# Altium PCB Connect.PCBDOC
Units mm, origin at the board's own origin, x right, y up, seen from the top; angles counter-clockwise.
Board outline 152.4 x 101.6 mm, 2 copper layers (Top Layer, Bottom Layer); 24 components, 27 nets, 102 pads, 2 vias.
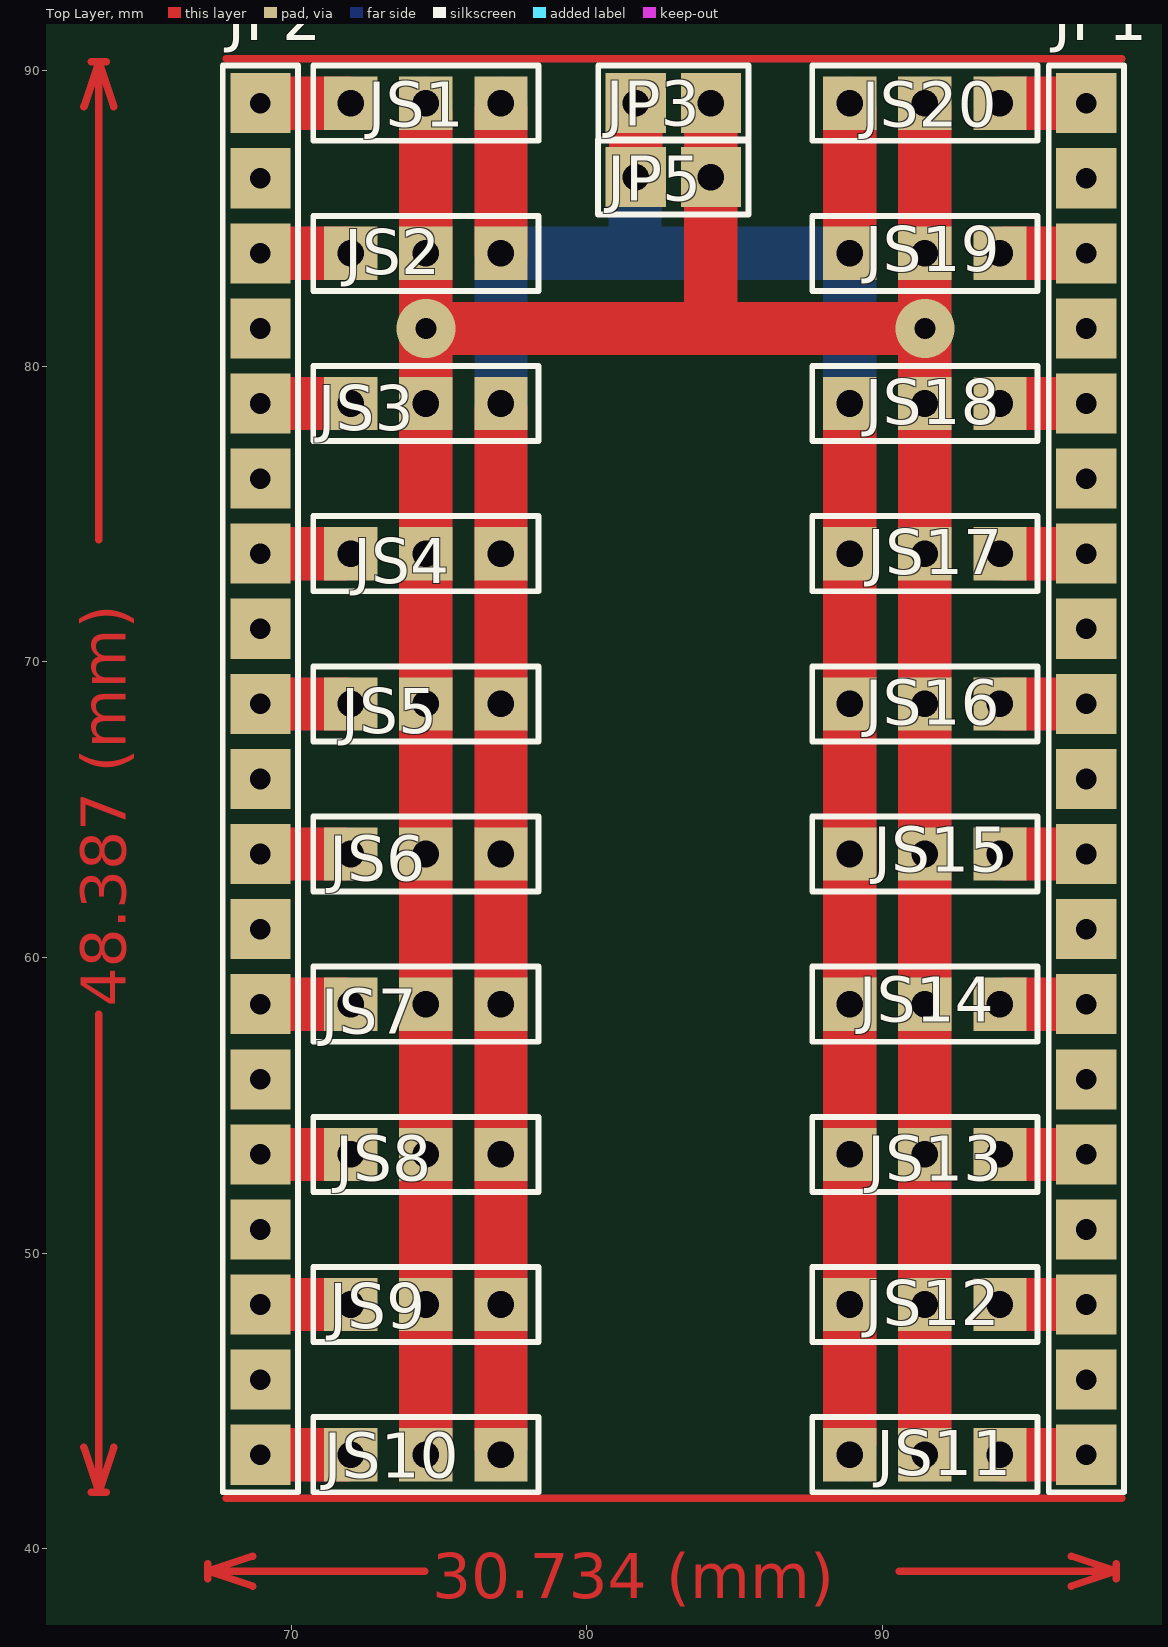
[diagram p0: Top Layer view]
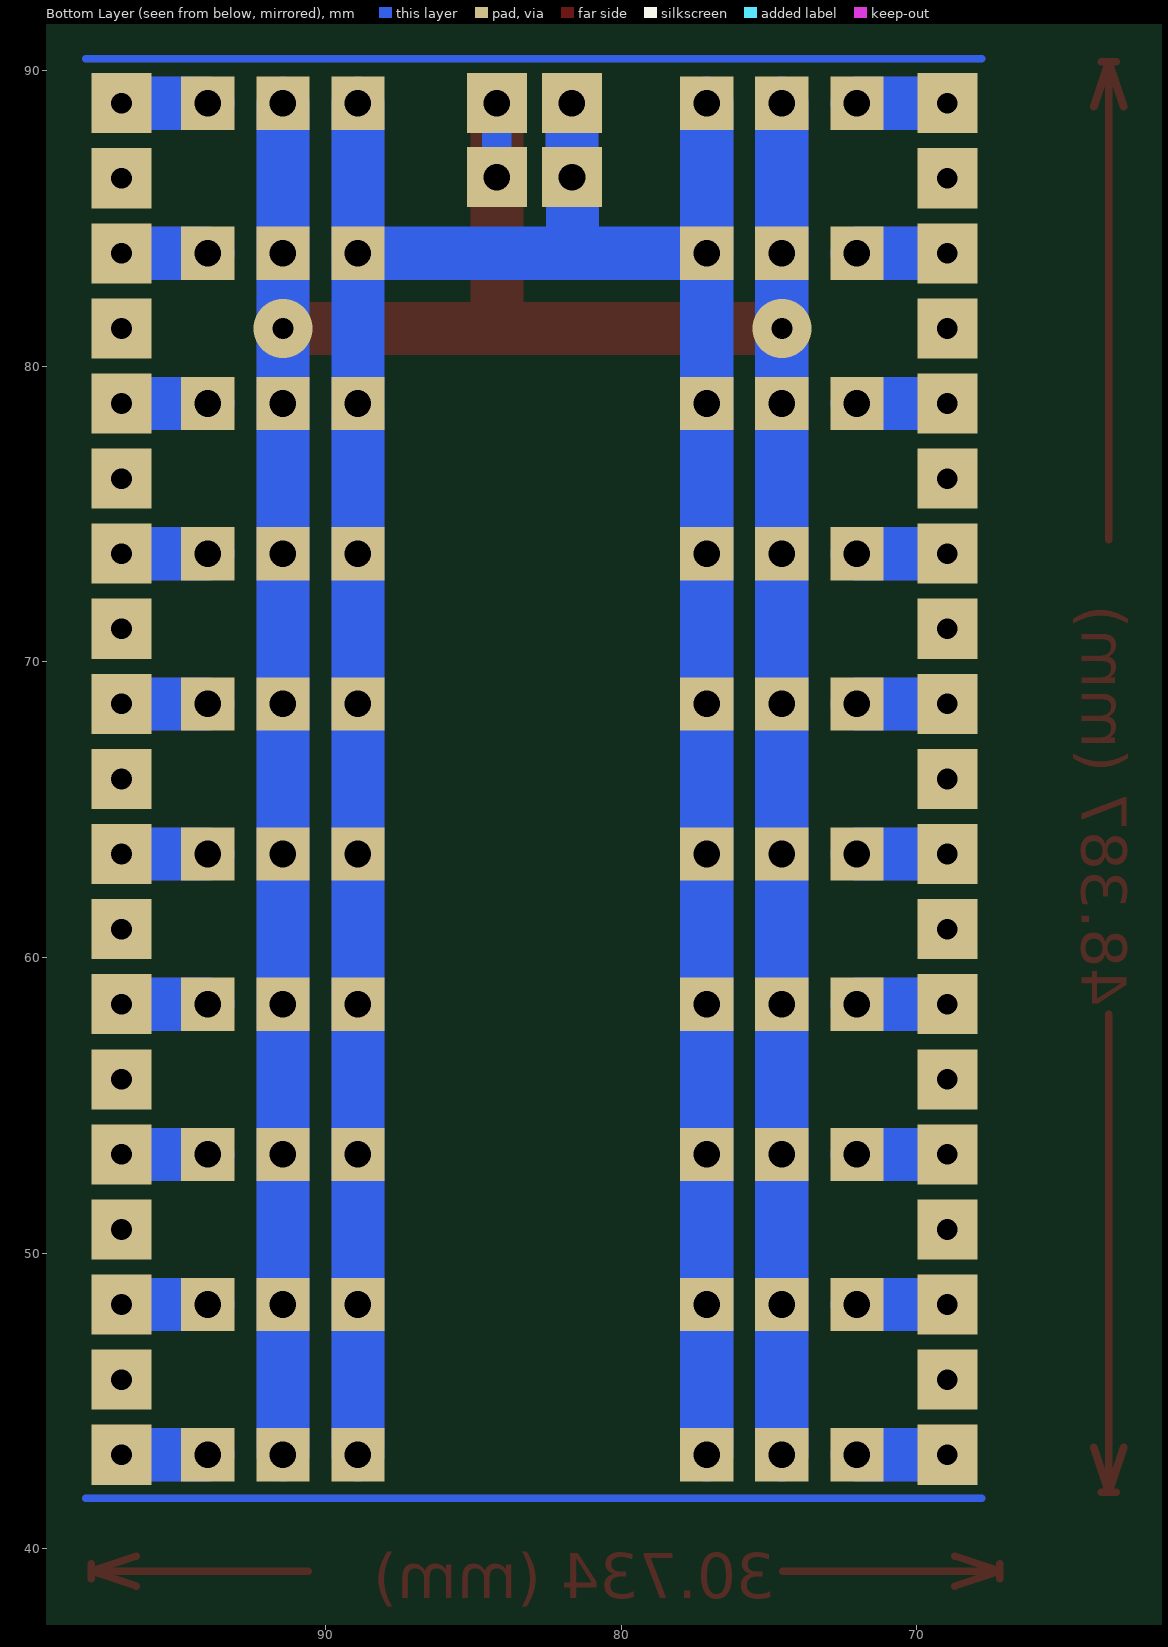
[diagram p1: Bottom Layer view, seen from below]

## Layer stack, top to bottom
Top Layer: signal copper 0.0356
Dielectric: dielectric 0.32, FR-4, Dk 4.8
Bottom Layer: signal copper 0.0356

## Board outline
25.4,25.4 177.8,25.4 177.8,127 25.4,127

## Design rules (kind name [scope] priority, off if disabled: settings)
Clearance [All] p1: gap=0.3
ComponentClearance [All] p1 off: gap=0.254 collisioncheckmode=0
PolygonConnect [All] p1: connectstyle=Relief reliefconductorwidth=0.254 reliefentries=4 polygonreliefangle="90 Angle"
RoutingLayers [All] p1: top layer=Horizontal bottom layer=Vertical
RoutingVias [All] p1: holewidth=0.711 width=1.27 viastyle="Through Hole" minholewidth=0.711 minwidth=1.27 maxholewidth=0.711 maxwidth=1.27
SolderMaskExpansion [All] p1: expansion=0.102
TestPointUsage [All] p1: valid=0 allowmultiple=FALSE
Testpoint [All] p1: side=15 testpointundercomponent=TRUE minsize=1.016 maxsize=2.54 preferedsize=1.524 minholesize=0 maxholesize=1.016 preferedholesize=0.813 testpointgrid=0.025 style=1023 order=-539222988
Width [All] p1: maxlimit=2 minlimit=0.3 preferedwidth=0.3 toplayer_minwidth=0.5 toplayer_prefwidth=1 bottomlayer_minwidth=0.5 bottomlayer_prefwidth=1 minimp=50.000000 maximp=50.000000 favimp=50.000000
16 further rules are at their usual default settings.

## Components (designator, comment, footprint, x,y, rotation, side; value= is the part's Value field where it differs from the comment)
JP1 "Header 19" HDR1X19 96.901,43.18 r90 top
JP2 "Header 19" HDR1X19 68.961,43.18 r90 top
JP3 "Header 2" HDR1X2 84.201,88.9 r180 top
JP5 "Header 2" HDR1X2 84.2,86.4 r180 top
JS1 "Header 3" HDR1X3 77.1,88.9 r180 top
JS2 "Header 3" HDR1X3 77.1,83.82 r180 top
JS3 "Header 3" HDR1X3 77.1,78.74 r180 top
JS4 "Header 3" HDR1X3 77.1,73.66 r180 top
JS5 "Header 3" HDR1X3 77.1,68.58 r180 top
JS6 "Header 3" HDR1X3 77.1,63.5 r180 top
JS7 "Header 3" HDR1X3 77.1,58.42 r180 top
JS8 "Header 3" HDR1X3 77.1,53.34 r180 top
JS9 "Header 3" HDR1X3 77.1,48.26 r180 top
JS10 "Header 3" HDR1X3 77.1,43.18 r180 top
JS11 "Header 3" HDR1X3 88.9,43.18 r0 top
JS12 "Header 3" HDR1X3 88.9,48.26 r0 top
JS13 "Header 3" HDR1X3 88.9,53.34 r0 top
JS14 "Header 3" HDR1X3 88.9,58.42 r0 top
JS15 "Header 3" HDR1X3 88.9,63.5 r0 top
JS16 "Header 3" HDR1X3 88.9,68.58 r0 top
JS17 "Header 3" HDR1X3 88.9,73.66 r0 top
JS18 "Header 3" HDR1X3 88.9,78.74 r0 top
JS19 "Header 3" HDR1X3 88.9,83.82 r0 top
JS20 "Header 3" HDR1X3 88.9,88.9 r0 top

## Footprints (in the part's own frame and the unit in brackets; to place one, negate y for a bottom-side part, rotate by r counter-clockwise, add the part's x,y. Pads: shape width x height; smd on the part's side, far side on the other; paste and mask are expansions set on the pad)
HDR1X2 [mil] "Connector; Header; 2 Position"
  rect 80x80 hole 35.43: 1(0,0) 2(100,0)
  silkscreen extent -50,-50 150,50
HDR1X3 [mm] "Connector; Header; 3 Position"
  rect 1.8x1.8 hole 0.9: 1(0,0) 2(2.54,0) 3(5.08,0)
  silkscreen extent -1.27,-1.27 6.35,1.27
HDR1X19 [mil] "Connector; Header; 19 Position"
  rect 80x80 hole 27.56: 1(0,0) 2(100,0) 3(200,0) 4(300,0) 5(400,0) 6(500,0) 7(600,0) 8(700,0) 9(800,0) 10(900,0) 11(1000,0) 12(1100,0) 13(1200,0) 14(1300,0) 15(1400,0) 16(1500,0) 17(1600,0) 18(1700,0) 19(1800,0)
  silkscreen extent -50,-50 1850,50

## Part data
JP1 JP2: "Header, 19-Pin"
JP3 JP5: "Header, 2-Pin"
JS1 JS2 JS3 JS4 JS5 JS6 JS7 JS8 JS9 JS10 JS11 JS12 JS13 JS14 JS15 JS16 JS17 JS18 JS19 JS20: "Header, 3-Pin"

## Via types
v1: diameter 2, hole 0.711, Top Layer to Bottom Layer, 2 vias

## Nets (pads, with @x,y where several pads share a name; then routed paths per layer and width w, separated by ;. In a path a pad name is that pad's centre, name@x,y a point inside that pad or via, vN(x,y) a via of type N, cw(c..) or ccw(c..) an arc to the next point about the centre after c; other vN are vias at no path point)
5V: JP3.1 JP5.1 JS1.2 JS2.2 JS3.2 JS4.2 JS5.2 JS6.2 JS7.2 JS8.2 JS9.2 JS10.2 JS11.2 JS12.2 JS13.2 JS14.2 JS15.2 JS16.2 JS17.2 JS18.2 JS19.2 JS20.2 | length 208.6
  Top Layer w1.8: JS10.2@74.56,43.33 JS1.2@74.56,88.53 ; v1(74.56,81.28) v1(91.44,81.28) ; 84.2,81.28 JP3.1@84.2,88.71 ; JS11.2@91.44,43.54 JS20.2@91.44,88.68
  Bottom Layer w1: JP5.1 JP3.1
  Bottom Layer w1.8: JS10.2 JS1.2 ; JS11.2 JS20.2
GND: JP3.2 JP5.2 JS1.1 JS2.1 JS3.1 JS4.1 JS5.1 JS6.1 JS7.1 JS8.1 JS9.1 JS10.1 JS11.1 JS12.1 JS13.1 JS14.1 JS15.1 JS16.1 JS17.1 JS18.1 JS19.1 JS20.1 | length 189.9
  Top Layer w1.8: JS10.1@77.1,43.44 JS3.1@77.1,78.51 ; JS2.1 JS1.1@77.1,88.7 ; JP5.2@81.66,86.69 JP3.2@81.66,88.7 ; JS11.1@88.9,43.59 JS18.1@88.9,78.39 ; JS19.1 JS20.1@88.9,88.65
  Bottom Layer w1.8: JS10.1 JS1.1 ; JS2.1 JS19.1 ; 81.64,83.82 JP3.2 ; JS11.1 JS20.1
NetC1_2: 
NetC3_1: 
NetC3_2: 
NetD4_1: 
NetD4_2: 
SERVO1: JP2.19 JS1.3 | length 5.9
  Top Layer w1.8: JP2.19@69.1,88.9 JS1.3@71.9,88.9
  Bottom Layer w1.8: JP2.19 JS1.3
SERVO2: JP2.17 JS2.3 | length 5.5
  Top Layer w1.8: JP2.17@69.5,83.82 JS2.3@71.91,83.82
  Bottom Layer w1.8: JP2.17 JS2.3
SERVO3: JP2.15 JS3.3 | length 5.6
  Top Layer w1.8: JP2.15@69.27,78.74 JS3.3@71.81,78.74
  Bottom Layer w1.8: JP2.15 JS3.3
SERVO4: JP2.13 JS4.3 | length 5.4
  Top Layer w1.8: JP2.13@69.45,73.66 JS4.3@71.78,73.66
  Bottom Layer w1.8: JP2.13 JS4.3
SERVO5: JP2.11 JS5.3 | length 5.5
  Top Layer w1.8: JP2.11@69.37,68.58 JS5.3@71.86,68.58
  Bottom Layer w1.8: JP2.11 JS5.3
SERVO6: JP2.9 JS6.3 | length 5.5
  Top Layer w1.8: JP2.9@69.3,63.5 JS6.3@71.78,63.5
  Bottom Layer w1.8: JP2.9 JS6.3
SERVO7: JP2.7 JS7.3 | length 5.4
  Top Layer w1.8: JP2.7@69.41,58.42 JS7.3@71.78,58.42
  Bottom Layer w1.8: JP2.7 JS7.3
SERVO8: JP2.5 JS8.3 | length 5.5
  Top Layer w1.8: JP2.5@69.43,53.34 JS8.3@71.89,53.34
  Bottom Layer w1.8: JP2.5 JS8.3
SERVO9: JP2.3 JS9.3 | length 5.5
  Top Layer w1.8: JP2.3@69.44,48.26 JS9.3@71.87,48.26
  Bottom Layer w1.8: JP2.3 JS9.3
SERVO10: JP2.1 JS10.3 | length 5.5
  Top Layer w1.8: JP2.1@69.43,43.18 JS10.3@71.87,43.18
  Bottom Layer w1.8: JP2.1 JS10.3
SERVO11: JP1.1 JS11.3 | length 5.5
  Top Layer w1.8: JS11.3@94.11,43.18 JP1.1@96.7,43.18
  Bottom Layer w1.8: JS11.3 JP1.1
SERVO12: JP1.3 JS12.3 | length 5.5
  Top Layer w1.8: JS12.3@94.17,48.26 JP1.3@96.73,48.26
  Bottom Layer w1.8: JS12.3 JP1.3
SERVO13: JP1.5 JS13.3 | length 5.4
  Top Layer w1.8: JS13.3@94.19,53.34 JP1.5@96.68,53.34
  Bottom Layer w1.8: JS13.3 JP1.5
SERVO14: JP1.7 JS14.3 | length 5.4
  Top Layer w1.8: JS14.3@94.2,58.42 JP1.7@96.66,58.42
  Bottom Layer w1.8: JS14.3 JP1.7
SERVO15: JP1.9 JS15.3 | length 5.4
  Top Layer w1.8: JS15.3@94.2,63.5 JP1.9@96.7,63.5
  Bottom Layer w1.8: JS15.3 JP1.9
SERVO16: JP1.11 JS16.3 | length 5.4
  Top Layer w1.8: JS16.3@94.14,68.58 JP1.11@96.62,68.58
  Bottom Layer w1.8: JS16.3 JP1.11
SERVO17: JP1.13 JS17.3 | length 5.4
  Top Layer w1.8: JS17.3@94.14,73.66 JP1.13@96.62,73.66
  Bottom Layer w1.8: JS17.3 JP1.13
SERVO18: JP1.15 JS18.3 | length 5.3
  Top Layer w1.8: JS18.3@94.13,78.74 JP1.15@96.54,78.74
  Bottom Layer w1.8: JS18.3 JP1.15
SERVO19: JP1.17 JS19.3 | length 5.3
  Top Layer w1.8: JS19.3@94.15,83.82 JP1.17@96.5,83.82
  Bottom Layer w1.8: JS19.3 JP1.17
SERVO20: JP1.19 JS20.3 | length 5.4
  Top Layer w1.8: JS20.3@94.11,88.9 JP1.19@96.56,88.9
  Bottom Layer w1.8: JS20.3 JP1.19
pads on no net: JP1.2 JP1.4 JP1.6 JP1.8 JP1.10 JP1.12 JP1.14 JP1.16 JP1.18 JP2.2 JP2.4 JP2.6 JP2.8 JP2.10 JP2.12 JP2.14 JP2.16 JP2.18
copper on no net: | length 61.9
  Top Layer w0.254: 62.992,43.434 63.5,41.91 ; 62.992,88.773 63.5,90.297 ; 63.246,41.91 63.754,41.91 ; 63.246,90.297 63.754,90.297 ; 63.5,58.08 63.5,41.91 ; 63.5,74.127 63.5,90.297 ; 64.008,43.434 63.5,41.91 ; 64.008,88.773 63.5,90.297 ; 67.183,38.989 67.183,39.497 ; 68.707,38.735 67.183,39.243 ; 68.707,39.751 67.183,39.243 ; 74.526,39.243 67.183,39.243 ; 90.574,39.243 97.917,39.243 ; 96.393,38.735 97.917,39.243 ; 96.393,39.751 97.917,39.243 ; 97.917,38.989 97.917,39.497

## Other copper
Top Layer:
  text "48.387 (mm)" at 64.414,58.334 h1.52 r90
  text "30.734 (mm)" at 74.78,38.329 h1.52
Multi-Layer:
  lines w0.254: 67.8,41.7 98.1,41.7 ; 67.8,90.4 98.1,90.4